# Altium PCB 野火_H750X_H743X_核心板_V1.0_底板原理图和PCB参考设计_AD格式.PcbDoc
Units mil, origin at the board's own origin, x right, y up, seen from the top; angles counter-clockwise.
Board outline 2194.77 x 2194.33 mil, 2 copper layers (TOP, BOTTOM), stack 10.4 mil thick; 6 components, 117 nets, 168 pads, 0 vias.
Unrouted connection lines stored in the file: 47.
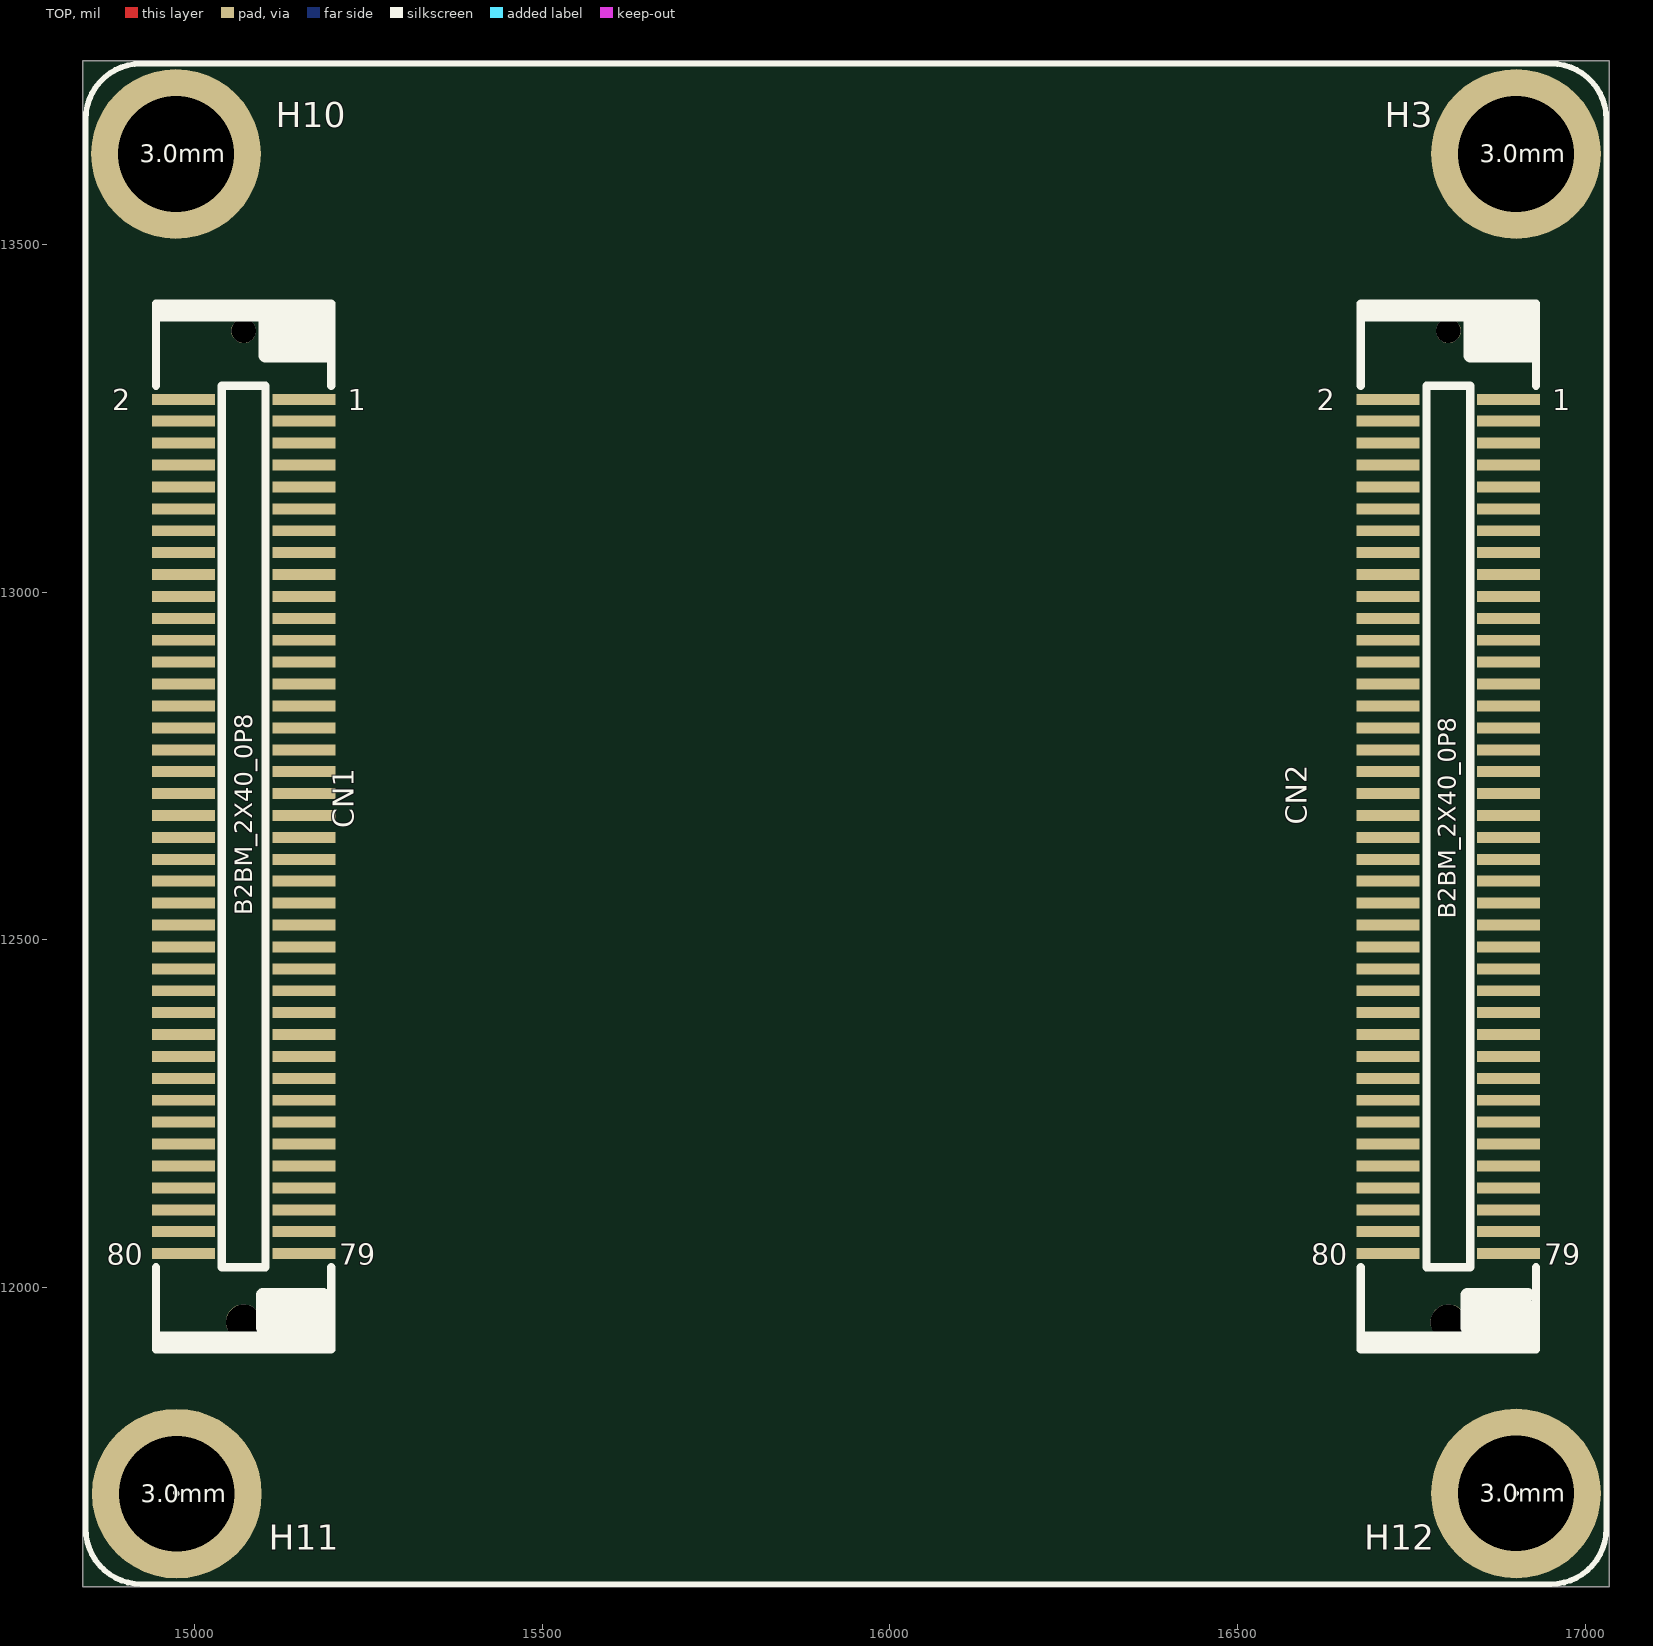
[diagram p0: TOP view]
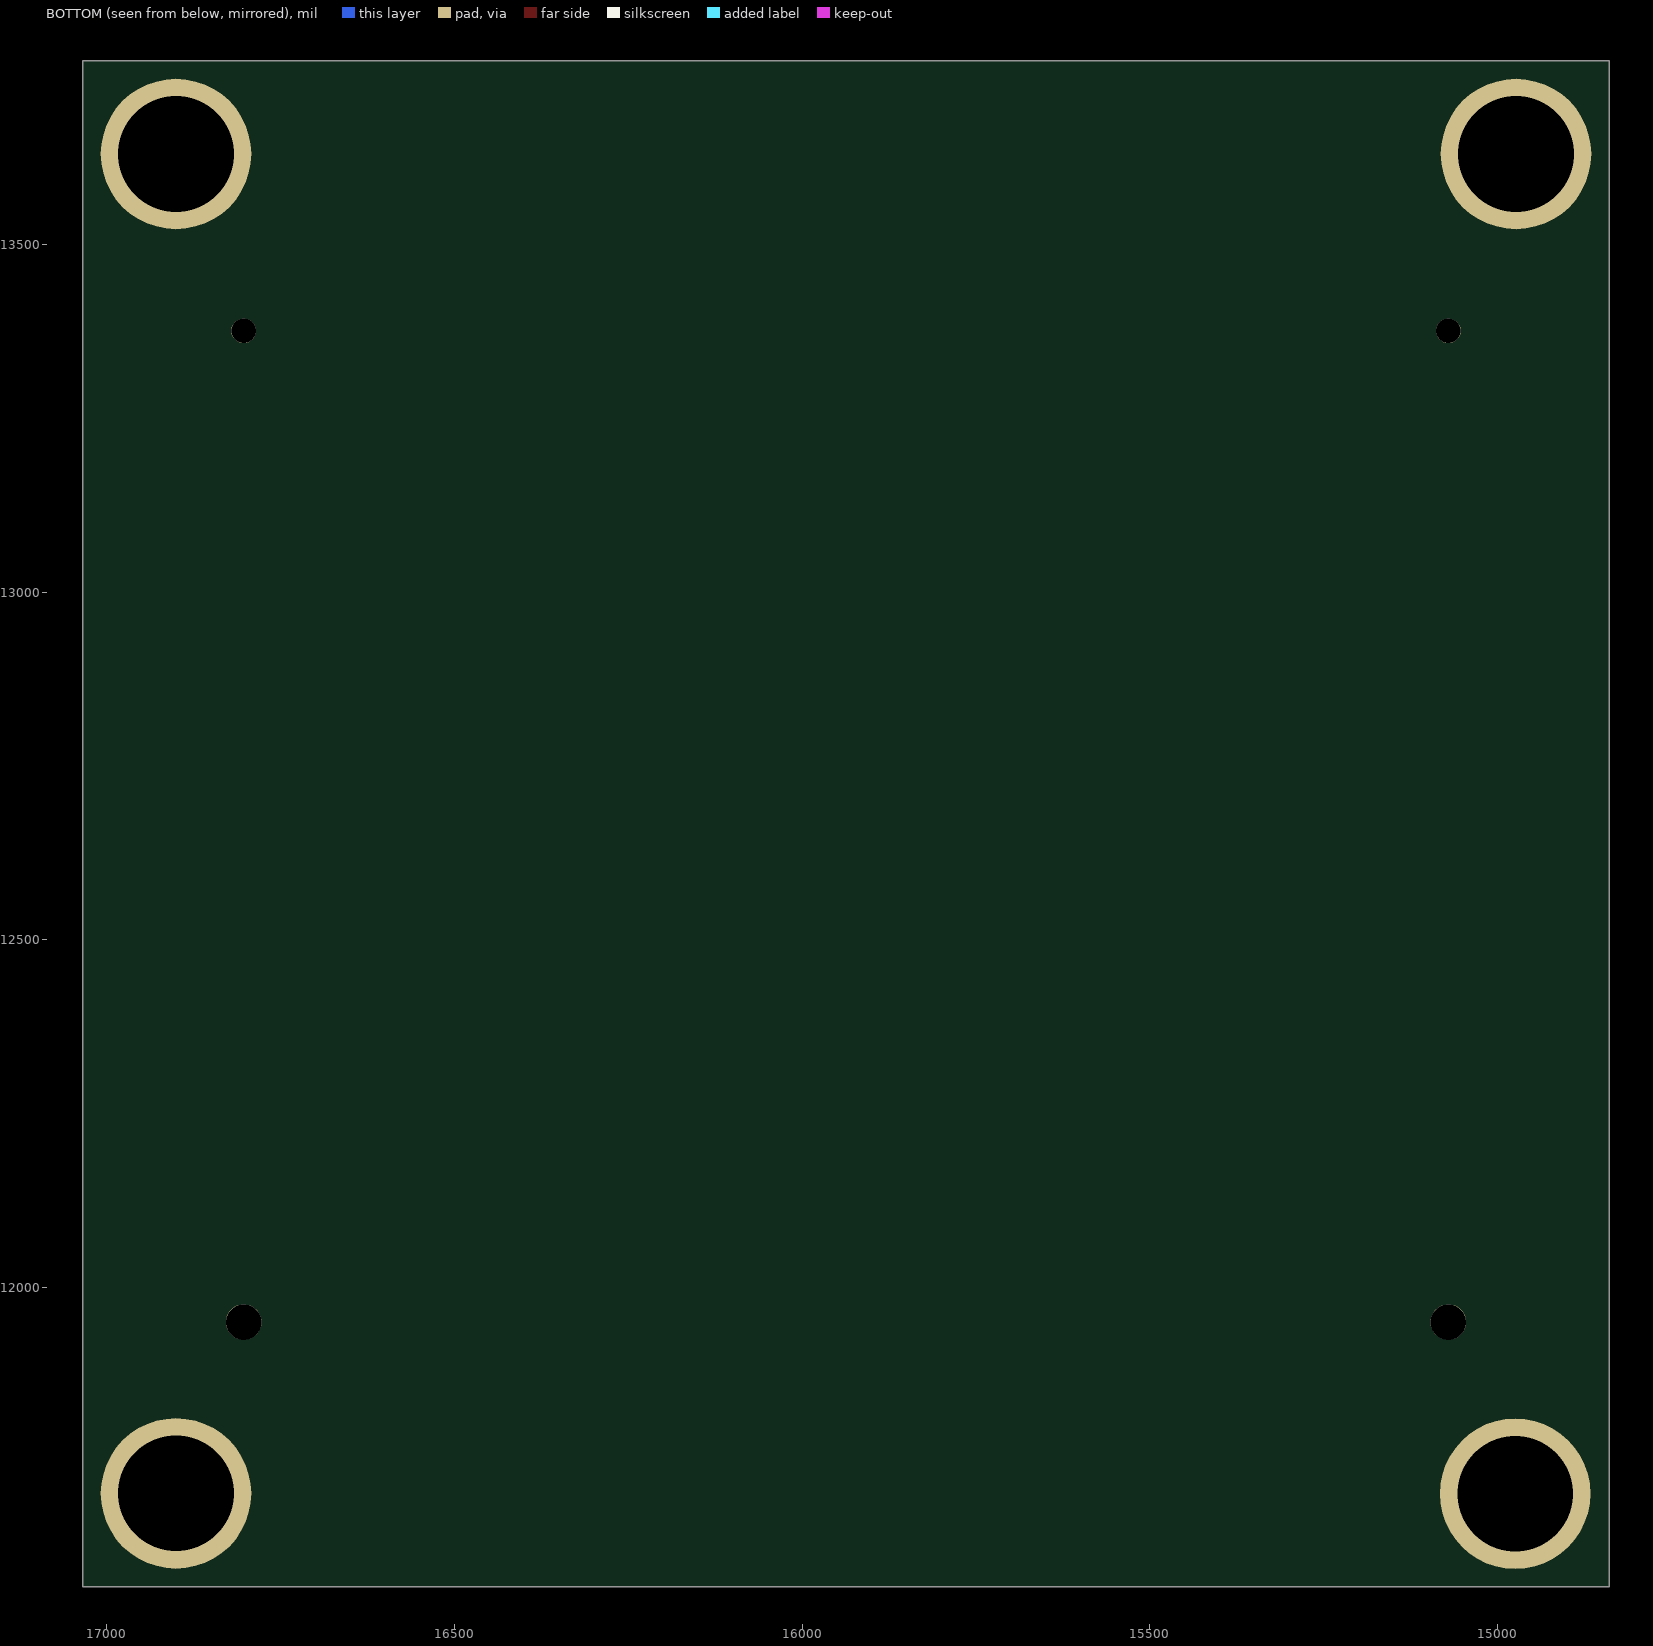
[diagram p1: BOTTOM view, seen from below]

## Layer stack, top to bottom
Top Solder: solder mask 0.4, Solder Resist, Dk 3.5
TOP: signal copper 1.2
Dielectric 1: core 8, FR-4, Dk 4.5
BOTTOM: signal copper 1.2
Bottom Solder: solder mask 0.4, Solder Resist, Dk 3.5

## Board outline
14839.45,11569.48 17034.22,11569.48 17034.22,13763.81 14839.45,13763.81

## Design rules (kind name [scope] priority, off if disabled: settings)
Clearance [All] p1: gap=10 ignorepadtopadclearanceinfootprint=FALSE except(0: Arc-Hole Track-Hole SMDPad-Hole THPad-Hole Via-Hole Fill-Hole Poly-Hole Region-Hole Text-Hole)
PlaneConnect [All] p1: planeconnectstyle=Direct reliefexpansion=20 reliefentries=4 reliefconductorwidth=10 reliefairgap=10
PolygonConnect [All] p1: connectstyle=Direct reliefconductorwidth=10 reliefentries=4 polygonreliefangle="90 Angle" airgapwidth=10
RoutingVias [All] p1: holewidth=28 width=50 viastyle="Through Hole" minholewidth=28 minwidth=50 maxholewidth=28 maxwidth=50
SolderMaskExpansion [All] p1: expansion=4
Width [All] p1: maxlimit=10 minlimit=10 preferedwidth=10 impedancedriven=TRUE minimp=0.000000 maximp=0.000000 favimp=99999999999999987200000000000000.000000
29 further rules are at their usual default settings.

## Components (designator, comment, footprint, x,y, rotation, side; value= is the part's Value field where it differs from the comment)
CN1 "B2BF_2X40_0_B2BM-2X40-0P8_B2BM_" B2BM-2X40-0P8 15070.69,12662.89 r0 top
CN2 "B2BF_2X40_0_B2BM-2X40-0P8_B2BM_" B2BM-2X40-0P8 16802.96,12662.89 r0 top
H3 "SPACER_0_T4R2-6R2_TOPSMT_IC_3.0" T4R2-6R2_TOPSMT 16900.22,13629.81 r0 top
H10 "SPACER_0_T4R2-6R2_TOPSMT_IC_3.0" T4R2-6R2_TOPSMT 14973.45,13629.81 r0 top
H11 "SPACER_0_T4R2-6R2_TOPSMT_IC_3.0" T4R2-6R2_TOPSMT 14974.69,11703.48 r0 top
H12 "SPACER_0_T4R2-6R2_TOPSMT_IC_3.0" T4R2-6R2_TOPSMT 16900.22,11703.83 r0 top

## Footprints (in the part's own frame and the unit in brackets; to place one, negate y for a bottom-side part, rotate by r counter-clockwise, add the part's x,y. Pads: shape width x height; smd on the part's side, far side on the other; paste and mask are expansions set on the pad)
B2BM-2X40-0P8 [mm] "B2BM-2X40-0P8"
  rect 2.3x0.4 smd: 1(2.2,15.6) 2(-2.2,15.6) 3(2.2,14.8) 4(-2.2,14.8) 5(2.2,14) 6(-2.2,14) 7(2.2,13.2) 8(-2.2,13.2) 9(2.2,12.4) 10(-2.2,12.4) 11(2.2,11.6) 12(-2.2,11.6) 13(2.2,10.8) 14(-2.2,10.8) 15(2.2,10) 16(-2.2,10) 17(2.2,9.2) 18(-2.2,9.2) 19(2.2,8.4) 20(-2.2,8.4) 21(2.2,7.6) 22(-2.2,7.6) 23(2.2,6.8) 24(-2.2,6.8) 25(2.2,6) 26(-2.2,6) 27(2.2,5.2) 28(-2.2,5.2) 29(2.2,4.4) 30(-2.2,4.4) 31(2.2,3.6) 32(-2.2,3.6) 33(2.2,2.8) 34(-2.2,2.8) 35(2.2,2) 36(-2.2,2) 37(2.2,1.2) 38(-2.2,1.2) 39(2.2,0.4) 40(-2.2,0.4) 41(2.2,-0.4) 42(-2.2,-0.4) 43(2.2,-1.2) 44(-2.2,-1.2) 45(2.2,-2) 46(-2.2,-2) 47(2.2,-2.8) 48(-2.2,-2.8) 49(2.2,-3.6) 50(-2.2,-3.6) 51(2.2,-4.4) 52(-2.2,-4.4) 53(2.2,-5.2) 54(-2.2,-5.2) 55(2.2,-6) 56(-2.2,-6) 57(2.2,-6.8) 58(-2.2,-6.8) 59(2.2,-7.6) 60(-2.2,-7.6) 61(2.2,-8.4) 62(-2.2,-8.4) 63(2.2,-9.2) 64(-2.2,-9.2) 65(2.2,-10) 66(-2.2,-10) 67(2.2,-10.8) 68(-2.2,-10.8) 69(2.2,-11.6) 70(-2.2,-11.6) 71(2.2,-12.4) 72(-2.2,-12.4) 73(2.2,-13.2) 74(-2.2,-13.2) 75(2.2,-14) 76(-2.2,-14) 77(2.2,-14.8) 78(-2.2,-14.8) 79(2.2,-15.6) 80(-2.2,-15.6)
  round 1.3 / inner round 1.524 / far side round 1.3 hole 1.3: 81(0,-18.1)
  round 0.9 / inner round 1.524 / far side round 0.9 hole 0.9: 82(0,18.1)
  silkscreen extent -3.2,-19.1 3.2,19.1
T4R2-6R2_TOPSMT [mil] "T4R2-6R2_TOPSMT"
  round 244.09 / inner round 60 / far side round 216.54 hole 166.14: 1(0,0)

## Nets (pads, with @x,y where several pads share a name; then routed paths per layer and width w, separated by ;. In a path a pad name is that pad's centre, name@x,y a point inside that pad or via, vN(x,y) a via of type N, cw(c..) or ccw(c..) an arc to the next point about the centre after c; other vN are vias at no path point)
5V: CN2.75 CN2.76 CN2.77 CN2.78 CN2.79 CN2.80
BOOT0: CN1.73
GND: CN1.9 CN1.39 CN1.45 CN1.46 CN1.57 CN1.58 CN1.59 CN1.65 CN1.66 CN1.69 CN1.70 CN1.79 CN1.80 CN2.1 CN2.2 CN2.11 CN2.12 CN2.21 CN2.22 CN2.37 CN2.38 CN2.39 CN2.41 CN2.43 CN2.44 CN2.47 CN2.48 CN2.51 CN2.52 CN2.53 CN2.54 CN2.59 CN2.60 CN2.61 CN2.62 CN2.69 CN2.70 CN2.71 CN2.72 H3.1 H10.1 H11.1 H12.1
NRST: CN2.8
PA0/WKUP: CN1.77
PA0_C: CN2.45
PA1: CN1.6
PA1_C: CN2.46
PA2: CN1.10
PA3: CN1.75
PA4: CN2.23
PA5: CN2.56
PA6: CN2.29
PA7: CN1.7
PA8: CN2.31
PA9: CN1.71
PA10: CN1.72
PA11: CN2.16
PA12: CN2.15
PA13: CN2.5
PA14: CN2.4
PA15: CN2.3
PB0: CN1.74
PB1: CN1.76
PB2: CN1.55
PB3: CN2.6
PB4: CN2.7
PB5: CN2.9
PB6: CN2.10
PB7: CN2.27
PB8: CN2.19
PB9: CN2.20
PB10: CN2.35
PB11: CN1.1
PB12: CN1.68
PB13: CN1.67
PB14: CN2.40
PB15: CN2.42
PC1: CN1.8
PC2: CN2.58
PC2_C: CN2.49
PC3: CN2.13
PC3_C: CN2.50
PC4: CN1.2
PC5: CN1.4
PC6: CN2.36
PC7: CN2.34
PC8: CN2.63
PC9: CN2.65
PC10: CN2.67
PC11: CN2.64
PC12: CN2.68
PC13/TAMPER: CN1.78
PD2: CN2.66
PD3: CN2.26
PD4: CN1.61
PD5: CN1.63
PD6: CN1.64
PD7: CN2.14
PD11: CN1.60
PD12: CN1.62
PD13: CN1.40
PE2: CN2.17
PE3: CN2.18
PE4: CN2.28
PE5: CN2.24
PE6: CN2.25
PF6: CN1.47
PF7: CN1.49
PF8: CN1.51
PF9: CN1.53
PF10: CN2.33
PG3: CN1.42
PG6: CN1.56
PG7: CN1.41
PG9: CN1.50
PG10: CN2.32
PG11: CN2.30
PG12: CN1.5
PG13: CN1.3
PG14: CN1.48
PH2: CN1.54
PH3: CN1.52
PH4: CN1.43
PH5: CN1.44
PI8: CN2.55
PI11: CN2.57
PI12: CN1.36
PI13: CN1.35
PI14: CN1.37
PI15: CN1.11
PJ0: CN1.12
PJ1: CN1.13
PJ2: CN1.14
PJ3: CN1.15
PJ4: CN1.16
PJ5: CN1.17
PJ6: CN1.18
PJ7: CN1.19
PJ8: CN1.20
PJ9: CN1.21
PJ10: CN1.22
PJ11: CN1.23
PJ12: CN1.27
PJ13: CN1.28
PJ14: CN1.29
PJ15: CN1.30
PK0: CN1.24
PK1: CN1.25
PK2: CN1.26
PK3: CN1.31
PK4: CN1.32
PK5: CN1.33
PK6: CN1.34
PK7: CN1.38
VBAT: CN2.74
VREF+: CN2.73
pads on no net: CN1.81 CN1.82 CN2.81 CN2.82

## Other copper
BOTTOM:
  pour cut-out: 0,0 10,0 10,10 0,10
  pour cut-out: 0,0 10,0 10,10 0,10
  pour cut-out: 0,0 10,0 10,10 0,10
  pour cut-out: 0,0 10,0 10,10 0,10
  pour cut-out: 0,0 10,0 10,10 0,10
  pour cut-out: 0,0 10,0 10,10 0,10
  pour cut-out: 0,0 10,0 10,10 0,10
  pour cut-out: 0,0 10,0 10,10 0,10
  pour cut-out: 0,0 10,0 10,10 0,10
  pour cut-out: 0,0 10,0 10,10 0,10
  pour cut-out: 0,0 10,0 10,10 0,10
  pour cut-out: 0,0 10,0 10,10 0,10
  pour cut-out: 0,0 10,0 10,10 0,10
  pour cut-out: 0,0 10,0 10,10 0,10
  pour cut-out: 0,0 10,0 10,10 0,10
  pour cut-out: 0,0 10,0 10,10 0,10
  pour cut-out: 0,0 10,0 10,10 0,10
  pour cut-out: 0,0 10,0 10,10 0,10
  pour cut-out: 0,0 10,0 10,10 0,10
  pour cut-out: 0,0 10,0 10,10 0,10
  pour cut-out: 0,0 10,0 10,10 0,10
  pour cut-out: 0,0 10,0 10,10 0,10
  pour cut-out: 0,0 10,0 10,10 0,10
  pour cut-out: 0,0 10,0 10,10 0,10
  pour cut-out: 0,0 10,0 10,10 0,10
  pour cut-out: 0,0 10,0 10,10 0,10
  pour cut-out: 0,0 10,0 10,10 0,10
  pour cut-out: 0,0 10,0 10,10 0,10
  pour cut-out: 0,0 10,0 10,10 0,10
  pour cut-out: 0,0 10,0 10,10 0,10

## Silkscreen, mask and mechanical layers (free items; w line width, h text height)
Top Overlay:
  pour cut-out: 0,0 10,0 10,10 0,10
  pour cut-out: 0,0 10,0 10,10 0,10
  pour cut-out: 0,0 10,0 10,10 0,10
  pour cut-out: 0,0 10,0 10,10 0,10
  pour cut-out: 0,0 10,0 10,10 0,10
  pour cut-out: 0,0 10,0 10,10 0,10
  pour cut-out: 0,0 10,0 10,10 0,10
  lines w8: 14973.45,11704.72 14974.69,11703.48 ; 16899.87,11703.48 16900.22,11703.83 ; 14843.45,11653.48 ccw(c14923.45,11653.48) 14923.45,11573.48 16950.22,11573.48 ccw(c16950.22,11653.48) 17030.22,11653.48 17030.22,13679.81 ccw(c16950.22,13679.81) 16950.22,13759.81 14923.45,13759.81 ccw(c14923.45,13679.81) 14843.45,13679.81 14843.45,11653.48

## Text inside footprints (layer, text, board x,y; h text height)
CN1: PIN_NUMBER "9" at 15147.3,13151.08 h25; PIN_NUMBER "79" at 15137.3,12048.72 h25; PIN_NUMBER "69" at 15137.3,12206.2 h25; PIN_NUMBER "65" at 15137.3,12269.19 h25; PIN_NUMBER "58" at 14964.08,12395.17 h25; PIN_NUMBER "59" at 15137.3,12363.68 h25; PIN_NUMBER "57" at 15137.3,12395.17 h25; PIN_NUMBER "46" at 14964.08,12584.15 h25; PIN_NUMBER "45" at 15137.3,12584.15 h25; PIN_NUMBER "39" at 15137.3,12678.64 h25; PIN_NUMBER "80" at 14964.08,12048.72 h25; PIN_NUMBER "70" at 14964.08,12206.2 h25; PIN_NUMBER "66" at 14964.08,12269.19 h25; PIN_NUMBER "82" at 15050.69,13375.49 h25; PIN_NUMBER "81" at 15050.69,11950.29 h25; PIN_NUMBER "73" at 15137.3,12143.2 h25; PIN_NUMBER "77" at 15137.3,12080.21 h25; PIN_NUMBER "6" at 14974.08,13214.07 h25; PIN_NUMBER "72" at 14964.08,12174.7 h25; PIN_NUMBER "15" at 15137.3,13056.59 h25; PIN_NUMBER "16" at 14964.08,13056.59 h25; PIN_NUMBER "10" at 14964.08,13151.08 h25; PIN_NUMBER "32" at 14964.08,12804.62 h25; PIN_NUMBER "7" at 15147.3,13182.58 h25; PIN_NUMBER "71" at 15137.3,12174.7 h25; PIN_NUMBER "14" at 14964.08,13088.09 h25; PIN_NUMBER "17" at 15137.3,13025.09 h25; PIN_NUMBER "1" at 15147.3,13277.06 h25; PIN_NUMBER "68" at 14964.08,12237.69 h25; PIN_NUMBER "67" at 15137.3,12237.69 h25; PIN_NUMBER "55" at 15137.3,12426.67 h25; PIN_NUMBER "8" at 14974.08,13182.58 h25; PIN_NUMBER "78" at 14964.08,12080.21 h25; PIN_NUMBER "2" at 14974.08,13277.06 h25; PIN_NUMBER "4" at 14974.08,13245.57 h25; PIN_NUMBER "60" at 14964.08,12363.68 h25; PIN_NUMBER "62" at 14964.08,12332.18 h25; PIN_NUMBER "40" at 14964.08,12678.64 h25; PIN_NUMBER "61" at 15137.3,12332.18 h25; PIN_NUMBER "63" at 15137.3,12300.69 h25; PIN_NUMBER "64" at 14964.08,12300.69 h25; PIN_NUMBER "27" at 15137.3,12867.61 h25; PIN_NUMBER "19" at 15137.3,12993.6 h25; PIN_NUMBER "20" at 14964.08,12993.6 h25; PIN_NUMBER "38" at 14964.08,12710.13 h25; PIN_NUMBER "47" at 15137.3,12552.65 h25; PIN_NUMBER "48" at 14964.08,12552.65 h25; PIN_NUMBER "49" at 15137.3,12521.16 h25; PIN_NUMBER "50" at 14964.08,12521.16 h25; PIN_NUMBER "51" at 15137.3,12489.66 h25; PIN_NUMBER "52" at 14964.08,12489.66 h25; PIN_NUMBER "22" at 14964.08,12962.1 h25; PIN_NUMBER "30" at 14964.08,12836.12 h25; PIN_NUMBER "28" at 14964.08,12867.61 h25; PIN_NUMBER "3" at 15147.3,13245.57 h25; PIN_NUMBER "5" at 15147.3,13214.07 h25; PIN_NUMBER "56" at 14964.08,12426.67 h25; PIN_NUMBER "53" at 15137.3,12458.17 h25; PIN_NUMBER "42" at 14964.08,12647.14 h25; PIN_NUMBER "18" at 14964.08,13025.09 h25; PIN_NUMBER "37" at 15137.3,12710.13 h25; PIN_NUMBER "21" at 15137.3,12962.1 h25; PIN_NUMBER "23" at 15137.3,12930.61 h25; PIN_NUMBER "11" at 15137.3,13119.58 h25; PIN_NUMBER "12" at 14964.08,13119.58 h25; PIN_NUMBER "43" at 15137.3,12615.65 h25; PIN_NUMBER "44" at 14964.08,12615.65 h25; PIN_NUMBER "54" at 14964.08,12458.17 h25; PIN_NUMBER "13" at 15137.3,13088.09 h25; PIN_NUMBER "24" at 14964.08,12930.61 h25; PIN_NUMBER "36" at 14964.08,12741.63 h25; PIN_NUMBER "26" at 14964.08,12899.11 h25; PIN_NUMBER "31" at 15137.3,12804.62 h25; PIN_NUMBER "35" at 15137.3,12741.63 h25; PIN_NUMBER "76" at 14964.08,12111.71 h25; PIN_NUMBER "41" at 15137.3,12647.14 h25; PIN_NUMBER "74" at 14964.08,12143.2 h25; PIN_NUMBER "75" at 15137.3,12111.71 h25; PIN_NUMBER "25" at 15137.3,12899.11 h25; PIN_NUMBER "33" at 15137.3,12773.13 h25; PIN_NUMBER "29" at 15137.3,12836.12 h25; PIN_NUMBER "34" at 14964.08,12773.13 h25; Top Overlay "B2BM_2X40_0P8" at 15083.33,12535 h25 r90; Top Overlay "80" at 14873.84,12032.97 h30; Top Overlay "2" at 14881.71,13261.32 h30; Top Overlay "79" at 15208.49,12032.97 h30; Top Overlay "1" at 15220.3,13261.32 h30
CN2: PIN_NUMBER "72" at 16696.35,12174.7 h25; PIN_NUMBER "71" at 16869.57,12174.7 h25; PIN_NUMBER "62" at 16696.35,12332.18 h25; PIN_NUMBER "70" at 16696.35,12206.2 h25; PIN_NUMBER "61" at 16869.57,12332.18 h25; PIN_NUMBER "69" at 16869.57,12206.2 h25; PIN_NUMBER "60" at 16696.35,12363.68 h25; PIN_NUMBER "54" at 16696.35,12458.17 h25; PIN_NUMBER "52" at 16696.35,12489.66 h25; PIN_NUMBER "59" at 16869.57,12363.68 h25; PIN_NUMBER "53" at 16869.57,12458.17 h25; PIN_NUMBER "51" at 16869.57,12489.66 h25; PIN_NUMBER "44" at 16696.35,12615.65 h25; PIN_NUMBER "48" at 16696.35,12552.65 h25; PIN_NUMBER "41" at 16869.57,12647.14 h25; PIN_NUMBER "43" at 16869.57,12615.65 h25; PIN_NUMBER "38" at 16696.35,12710.13 h25; PIN_NUMBER "37" at 16869.57,12710.13 h25; PIN_NUMBER "39" at 16869.57,12678.64 h25; PIN_NUMBER "22" at 16696.35,12962.1 h25; PIN_NUMBER "21" at 16869.57,12962.1 h25; PIN_NUMBER "12" at 16696.35,13119.58 h25; PIN_NUMBER "11" at 16869.57,13119.58 h25; PIN_NUMBER "2" at 16706.35,13277.06 h25; PIN_NUMBER "1" at 16879.57,13277.06 h25; PIN_NUMBER "47" at 16869.57,12552.65 h25; PIN_NUMBER "75" at 16869.57,12111.71 h25; PIN_NUMBER "77" at 16869.57,12080.21 h25; PIN_NUMBER "79" at 16869.57,12048.72 h25; PIN_NUMBER "80" at 16696.35,12048.72 h25; PIN_NUMBER "78" at 16696.35,12080.21 h25; PIN_NUMBER "76" at 16696.35,12111.71 h25; PIN_NUMBER "82" at 16782.96,13375.49 h25; PIN_NUMBER "81" at 16782.96,11950.29 h25; PIN_NUMBER "8" at 16706.35,13182.58 h25; PIN_NUMBER "5" at 16879.57,13214.07 h25; PIN_NUMBER "4" at 16706.35,13245.57 h25; PIN_NUMBER "3" at 16879.57,13245.57 h25; PIN_NUMBER "23" at 16869.57,12930.61 h25; PIN_NUMBER "56" at 16696.35,12426.67 h25; PIN_NUMBER "29" at 16869.57,12836.12 h25; PIN_NUMBER "31" at 16869.57,12804.62 h25; PIN_NUMBER "35" at 16869.57,12741.63 h25; PIN_NUMBER "40" at 16696.35,12678.64 h25; PIN_NUMBER "42" at 16696.35,12647.14 h25; PIN_NUMBER "6" at 16706.35,13214.07 h25; PIN_NUMBER "7" at 16879.57,13182.58 h25; PIN_NUMBER "9" at 16879.57,13151.08 h25; PIN_NUMBER "19" at 16869.57,12993.6 h25; PIN_NUMBER "20" at 16696.35,12993.6 h25; PIN_NUMBER "67" at 16869.57,12237.69 h25; PIN_NUMBER "64" at 16696.35,12300.69 h25; PIN_NUMBER "68" at 16696.35,12237.69 h25; PIN_NUMBER "58" at 16696.35,12395.17 h25; PIN_NUMBER "13" at 16869.57,13088.09 h25; PIN_NUMBER "36" at 16696.35,12741.63 h25; PIN_NUMBER "34" at 16696.35,12773.13 h25; PIN_NUMBER "63" at 16869.57,12300.69 h25; PIN_NUMBER "65" at 16869.57,12269.19 h25; PIN_NUMBER "66" at 16696.35,12269.19 h25; PIN_NUMBER "26" at 16696.35,12899.11 h25; PIN_NUMBER "14" at 16696.35,13088.09 h25; PIN_NUMBER "17" at 16869.57,13025.09 h25; PIN_NUMBER "18" at 16696.35,13025.09 h25; PIN_NUMBER "57" at 16869.57,12395.17 h25; PIN_NUMBER "55" at 16869.57,12426.67 h25; PIN_NUMBER "74" at 16696.35,12143.2 h25; PIN_NUMBER "50" at 16696.35,12521.16 h25; PIN_NUMBER "32" at 16696.35,12804.62 h25; PIN_NUMBER "16" at 16696.35,13056.59 h25; PIN_NUMBER "30" at 16696.35,12836.12 h25; PIN_NUMBER "28" at 16696.35,12867.61 h25; PIN_NUMBER "46" at 16696.35,12584.15 h25; PIN_NUMBER "24" at 16696.35,12930.61 h25; PIN_NUMBER "10" at 16696.35,13151.08 h25; PIN_NUMBER "15" at 16869.57,13056.59 h25; PIN_NUMBER "25" at 16869.57,12899.11 h25; PIN_NUMBER "33" at 16869.57,12773.13 h25; PIN_NUMBER "73" at 16869.57,12143.2 h25; PIN_NUMBER "45" at 16869.57,12584.15 h25; PIN_NUMBER "49" at 16869.57,12521.16 h25; PIN_NUMBER "27" at 16869.57,12867.61 h25; Top Overlay "B2BM_2X40_0P8" at 16813.33,12530 h25 r90; Top Overlay "80" at 16606.11,12032.97 h30; Top Overlay "2" at 16613.98,13261.32 h30; Top Overlay "79" at 16940.76,12032.97 h30; Top Overlay "1" at 16952.57,13261.32 h30
H3: PIN_NUMBER "1" at 16890.22,13629.81 h25; Top Overlay "3.0mm" at 16848.22,13617.73 h25
H10: PIN_NUMBER "1" at 14963.45,13629.81 h25; Top Overlay "3.0mm" at 14921.45,13617.73 h25
H11: PIN_NUMBER "1" at 14964.69,11703.48 h25; Top Overlay "3.0mm" at 14922.69,11691.4 h25
H12: PIN_NUMBER "1" at 16890.22,11703.83 h25; Top Overlay "3.0mm" at 16848.22,11691.75 h25